# EAGLE board TSAL_rev02 (EAGLE 6.6.0)
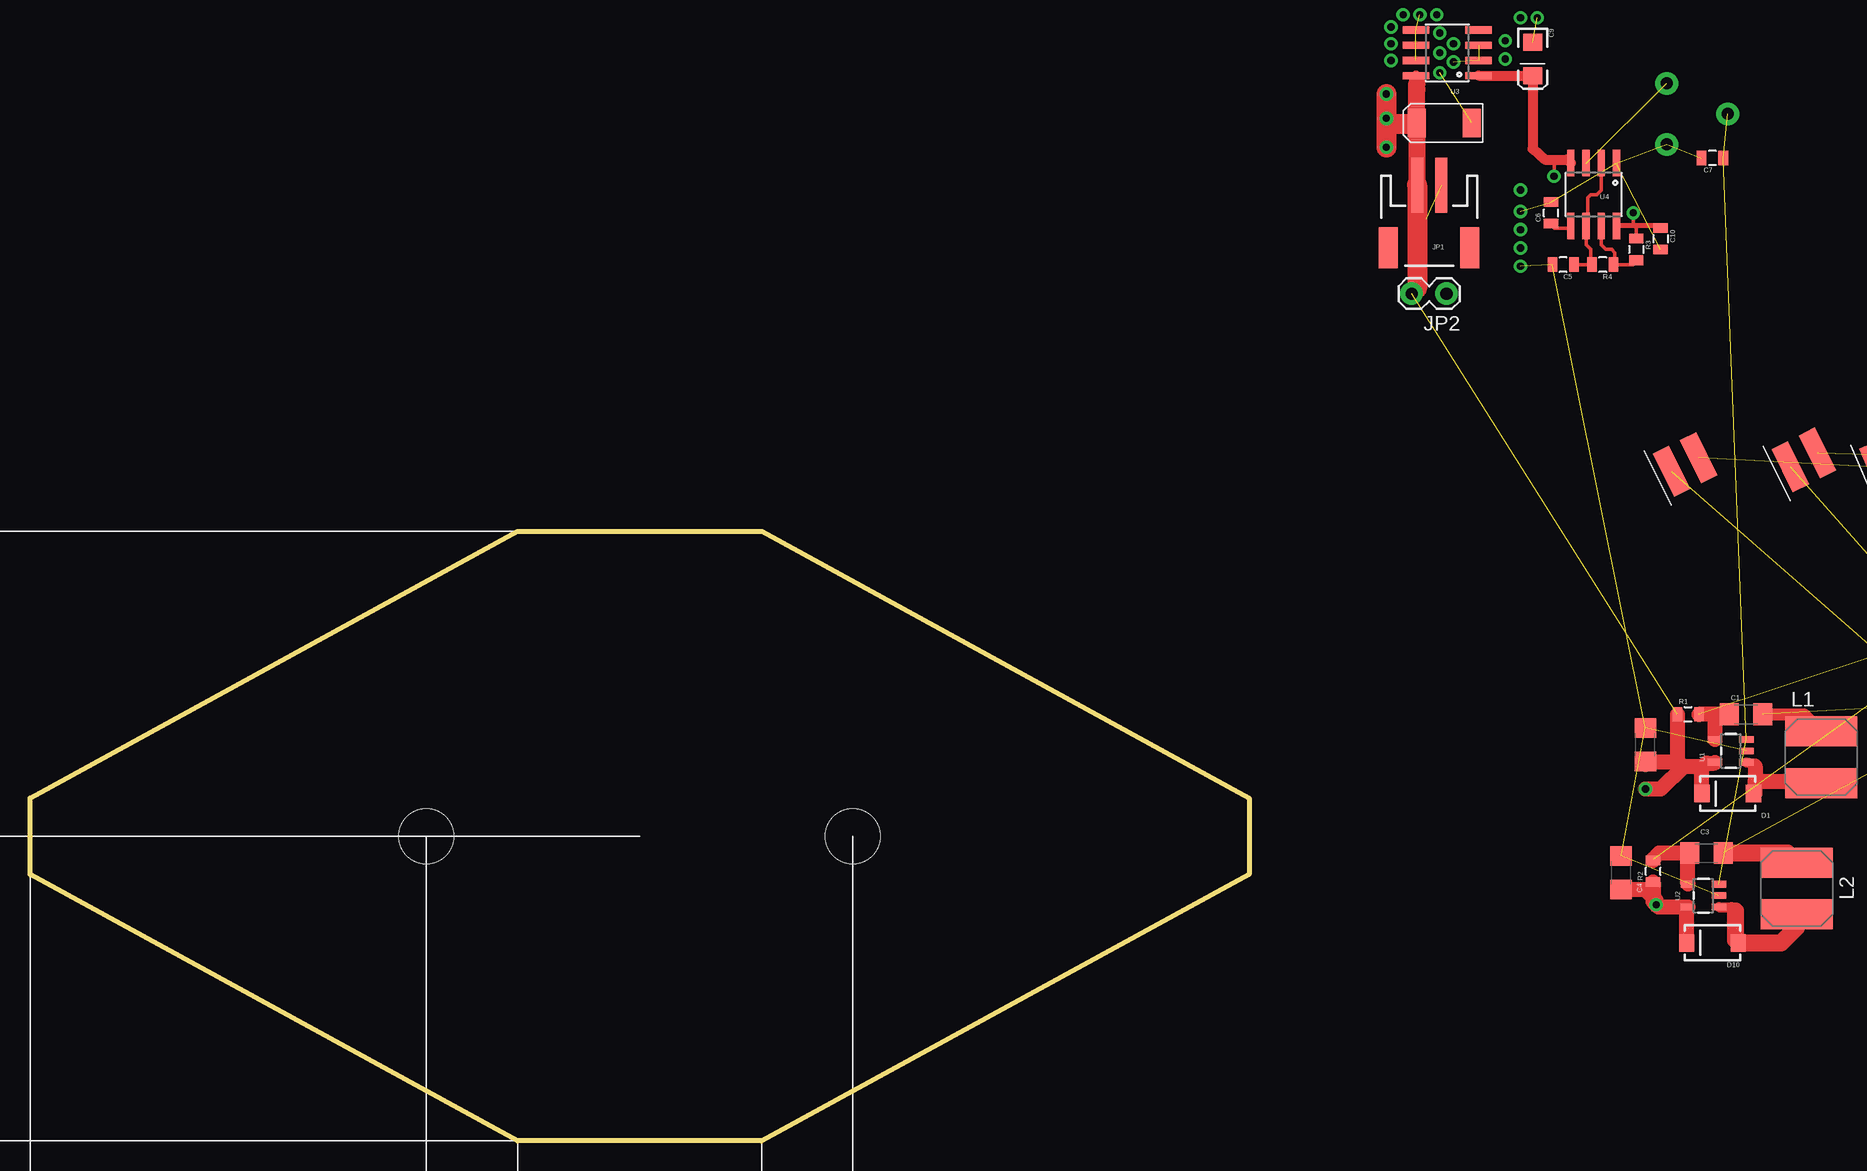
[diagram p0: board, top side]
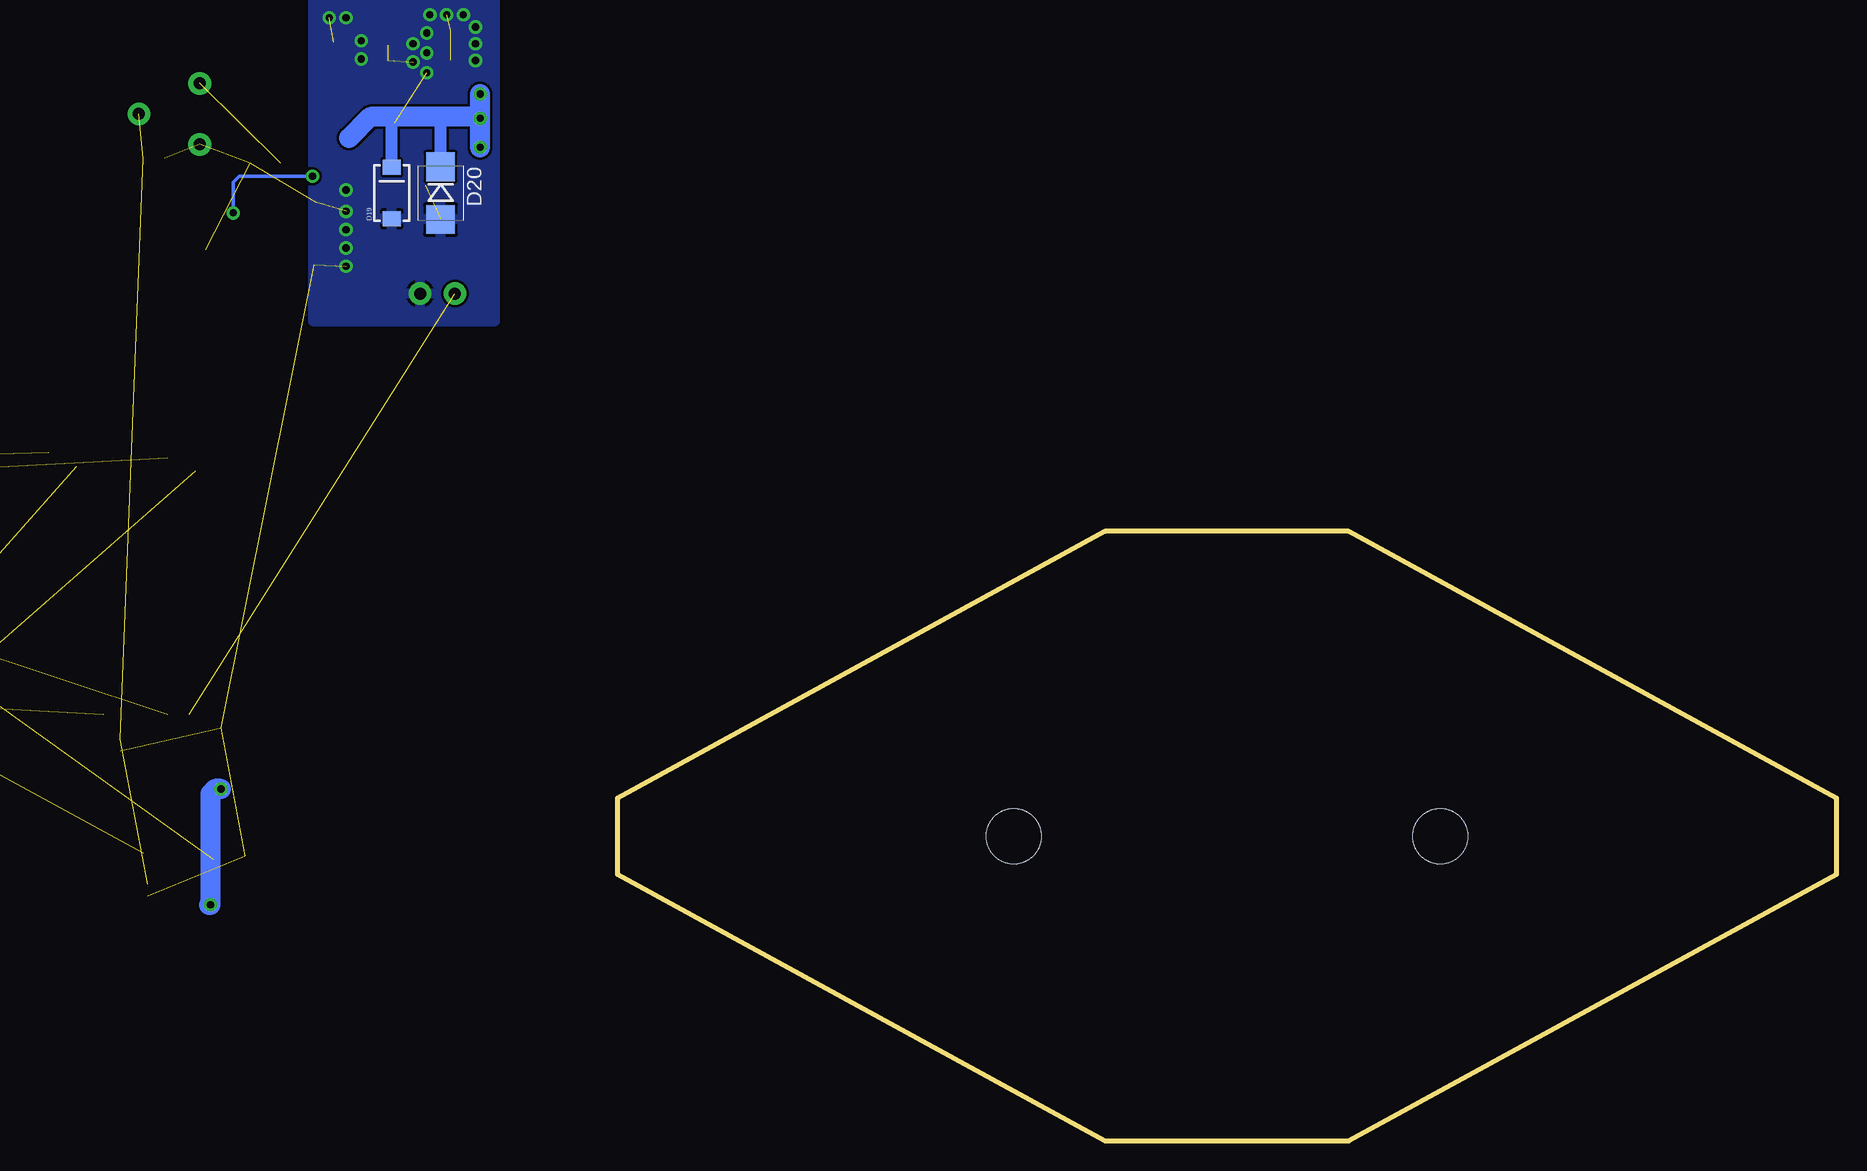
[diagram p1: board, bottom side, seen from below]

Size 101.6 x 50.8 mm. Coordinates in mm from the lower left corner, seen from the top.
Outline: 0,22.22 0,28.57 40.64,50.8 60.96,50.8 101.6,28.57 101.6,22.22 60.96,0 40.64,0 0,22.22
Copper layers (1*16): Top 0.035mm / dielectric 1.5mm / Bottom 0.035mm
Design rules "Sparkfun": minimum track width 8mil, minimum drill 20mil, track to track 8mil, track to pad 8mil, pad to pad 8mil, via to via 8mil, smd to smd 8mil, copper to edge 8mil, drill to drill 8mil, minimum pad ring 12mil, minimum via ring 10mil, stop-mask expansion 4mil, vias tented up to drill 20mil, thermal gap 10mil
Net classes: 0 default: width 0.254 mm; 1 power: width 0.508 mm
Holes 4.57 mm at 33.02,25.4 68.58,25.4

## Footprints (pad centres in the part's own frame; a part is rotated, then mirrored left to right if it is on the bottom)
1206 = smd 1.6 x 1.8: 1 -1.4,0; 2 1.4,0
0805 = smd 0.8 x 1.2: 1 -0.9,0; 2 0.9,0
EIA6032 = smd 1.5 x 2.4: P$1 -2.3,0; P$2 2.3,0
EIA3216 = smd 1.4 x 1.6: A 1.4,0; C -1.4,0
SMA-DIODE = smd 1.27 x 1.47: A -2.15,0; C 2.15,0
LED-SM = smd 1.5 x 4: A 1.27,0; C -1.27,0
SMB-DIODE = smd 2.4 x 2.4: A 2.2,0; C -2.2,0
JST-2-SMD = smd 1 x 4.6: 1 -1,-3.7; 2 1,-3.7 | smd 1.6 x 3.4: NC1 -3.4,1.5; NC2 3.4,1.5
1X02_LOCK = drill 1.016 pad 1.88: 1 -0.178,0; 2 2.718,0
SRN6045 = smd 2.5 x 6: 1 -2.175,-0.175; 2 2.125,-0.175
TRIM_POT = drill 1 pad 1.88: 1 5.08,0; 2 0,2.54; 3 0,-2.54
SOT23-5 = smd 0.55 x 1.2: 1 -0.95,-1.3; 2 0,-1.3; 3 0.95,-1.3; 4 0.95,1.3; 5 -0.95,1.3
SO08 = smd 0.61 x 2.21: 1 -1.905,-2.616; 2 -0.635,-2.616; 3 0.635,-2.616; 4 1.905,-2.616; 5 1.905,2.616; 6 0.635,2.616; 7 -0.635,2.616; 8 -1.905,2.616

## Placement (x,y rotation side)
C1  1uF  [1206]  143,35.56 0 top  (outside the outline)
C2  2.2uF  [1206]  134.62,33.02 90 top  (outside the outline)
C3  1uF  [1206]  139.7,24 0 top  (outside the outline)
C4  2.2uF  [1206]  132.59,22.35 90 top  (outside the outline)
C5  47uF  [0805]  127.76,73.03 180 top  (outside the outline)
C6  10uF  [0805]  126.75,77.34 90 top  (outside the outline)
C7  10uF  [0805]  140.21,81.91 180 top  (outside the outline)
C8  [EIA6032]  117.86,84.84 0 top  (outside the outline)
C9  [EIA3216]  125.22,90.17 270 top  (outside the outline)
C10  .1uF  [0805]  135.89,75.18 270 top  (outside the outline)
D1  MBRA140  [SMA-DIODE]  141.48,28.96 180 top  (outside the outline)
D2  [LED-SM]  183.13,51.05 338.2 top  (outside the outline)
D3  [LED-SM]  171.83,55.5 335.6 top  (outside the outline)
D4  [LED-SM]  161.93,57.02 359.3 top  (outside the outline)
D5  [LED-SM]  147.83,56.77 26.5 top  (outside the outline)
D6  [LED-SM]  192.4,6.35 242.8 top  (outside the outline)
D7  [LED-SM]  186.82,15.24 248.2 top  (outside the outline)
D8  [LED-SM]  184.02,27.05 271 top  (outside the outline)
D9  [LED-SM]  177.67,36.2 293.2 top  (outside the outline)
D10  MBRA140  [SMA-DIODE]  140.21,16.51 180 top  (outside the outline)
D11  [LED-SM]  176.15,54.1 337.5 top  (outside the outline)
D12  [LED-SM]  167,56.52 0 top  (outside the outline)
D13  [LED-SM]  155.07,56.64 23.2 top  (outside the outline)
D14  [LED-SM]  137.92,56.39 26.5 top  (outside the outline)
D15  [LED-SM]  190.12,10.67 245.2 top  (outside the outline)
D16  [LED-SM]  186.69,20.57 270.1 top  (outside the outline)
D17  [LED-SM]  180.47,31.75 297 top  (outside the outline)
D18  [LED-SM]  177.55,42.42 296.5 top  (outside the outline)
D19  TVS  [SMA-DIODE]  120.4,78.99 90 bottom  (outside the outline)
D20  30v  [SMB-DIODE]  116.33,78.99 270 bottom  (outside the outline)
JP1  M02-JST-2MM-SMT  [JST-2-SMD]  116.59,75.95 180 top  (outside the outline)
JP2  M02LOCK  [1X02_LOCK]  117.86,70.61 180 top  (outside the outline)
L1  33uH  [SRN6045]  149.1,32 90 top  (outside the outline)
L2  33uH  [SRN6045]  147.07,21.08 90 top  (outside the outline)
R1  5R  [0805]  138.18,35.56 0 top  (outside the outline)
R2  5R  [0805]  135.25,22.48 90 top  (outside the outline)
R3  10k  [0805]  133.86,74.3 270 top  (outside the outline)
R4  1k  [0805]  131.06,73.03 180 top  (outside the outline)
RV1  [TRIM_POT]  136.4,85.6 0 top  (outside the outline)
U1  [SOT23-5]  141.73,32.51 90 top  (outside the outline)
U2  [SOT23-5]  139.45,20.45 90 top  (outside the outline)
U3  LM2931D-5.0R2G  [SO08]  118.11,90.68 90 top  (outside the outline)
U4  [SO08]  130.3,78.87 180 top  (outside the outline)
U$1  LOGOL  [L-L]  150.75,63.37 0 top  (outside the outline)

## Library data of the parts
C1 C3 = SparkFun-Capacitors; PROD_ID: CAP-09822
C2 C4 = SparkFun-Capacitors; PROD_ID: CAP-10009
C5-C10 = SparkFun-Capacitors
D1 D10 = SparkFun-DiscreteSemi; PROD_ID: DIO-08053
D2-D9 D11-D18 = FSAE Eletric
D19 D20 = SparkFun-DiscreteSemi
JP1 = SparkFun-Connectors; PROD_ID: CONN-08352
JP2 = SparkFun-Connectors
L1 L2 = SparkFun-Passives; PROD_ID: NDUC-11627
R1-R4 = SparkFun-Resistors; PROD_ID: RES-11622
RV1 = SparkFun-Electromechanical
U1 U2 = SparkFun-PowerIC; PROD_ID: IC-11626
U3 = SparkFun-PowerIC
U4 = SparkFun-AnalogIC
U$1 = untitled

## Nets
+5V: C9.A C10.1 R3.1 U3.1 U4.4 U4.8
GND: C2.2 C4.2 C5.2 C6.2 C7.2 C8.P$2 C9.C C10.2 D19.A D20.A JP1.1 JP2.1 RV1.3 U1.2 U2.2 U3.2 U3.3 U3.5 U3.6 U3.7 U4.1
N$1: D2.C D3.A
N$2: D4.C D5.A
N$3: D6.C D7.A
N$4: D8.C D9.A
N$5: D3.C D4.A
N$6: D5.C D6.A
N$7: D7.C D8.A
N$8: D11.C D12.A
N$9: D13.C D14.A
N$10: D15.C D16.A
N$11: D17.C D18.A
N$12: D12.C D13.A
N$13: D14.C D15.A
N$14: D16.C D17.A
N$15: R3.2 R4.1 U4.7
N$16: C5.1 R4.2 U4.2 U4.6
N$17: C6.1 U4.5
N$18: RV1.2 U4.3
N$20: C7.1 RV1.1 U1.3 U2.3
OUT+: C1.1 D2.A R1.2 U1.4
OUT+1: C3.1 D11.A R2.2 U2.4
OUT- [power]: C1.2 D9.C L1.2
OUT-1 [power]: C3.2 D18.C L2.2
SW: D1.A L1.1 U1.1
SW1: D10.A L2.1 U2.1
VIN: C2.1 C4.1 C8.P$1 D1.C D10.C D19.C D20.C JP1.2 JP2.2 R1.1 R2.1 U1.5 U2.5 U3.8

## Tracks (layer width: path | path; a pad name or v marks a point on that pad's centre or on a via)
+5V  (via drill 0.6)
  Top 0.305: R3.1 133.86,76.07 133.6,76.33 | 133.6,76.33 132.28,76.33 U4.8 | U4.4 126.95,81.74 127,81.69 v127,80.39 | v133.6,77.34 133.6,76.33
  Top 0.406: C10.1 135.64,76.25 U4.8
  Top 0.813: U3.1 124.71,88.77 C9.A 125.22,82.68 126.24,81.79 128.09,81.79 U4.4
  Bottom 0.305: v127,80.39 133.1,80.39 133.6,79.88 v133.6,77.34
GND  (via drill 0.6)  (18 unrouted)
  other vias: 122.94,90.17 122.94,91.69 118.62,89.92 118.62,91.44 113.41,90.04 113.41,91.44 113.41,92.84 114.43,93.85 115.82,93.85 117.22,93.85 117.47,90.68 117.47,89.03 117.47,92.33 124.21,93.6 125.6,93.6 124.21,75.95 124.21,77.47 124.21,79.25 124.21,74.42 124.21,72.9
  pour Bottom: 111.76,68.33 111.76,96.27 127,96.27 127,68.33
N$1  (1 unrouted)
N$2  (1 unrouted)
N$3  (1 unrouted)
N$4  (1 unrouted)
N$5  (1 unrouted)
N$6  (1 unrouted)
N$7  (1 unrouted)
N$8  (1 unrouted)
N$9  (1 unrouted)
N$10  (1 unrouted)
N$11  (1 unrouted)
N$12  (1 unrouted)
N$13  (1 unrouted)
N$14  (1 unrouted)
N$15
  Top 0.305: U4.7 130.94,74.68 131.32,74.3 131.83,74.3 132.08,74.04 132.08,73.14 R4.1 133.6,73.03 133.86,73.28 R3.2
N$16
  Top 0.305: C5.1 R4.2 130.05,73.14 130.05,74.3 129.67,74.68 U4.6 129.79,76.38 129.79,78.61 130.05,78.87 130.56,78.87 130.94,79.25 U4.2
N$17
  Top 0.305: C6.1 126.75,76.33 127,76.07 128.22,76.07 U4.5
N$18  (1 unrouted)
N$20  (3 unrouted)
OUT+  (1 unrouted)
  Top 1.27: C1.1 140.46,35.56 | 140.46,35.56 R1.2 | U1.4 140.43,35.53 140.46,35.56
OUT+1  (1 unrouted)
  Top 1.27: R2.2 135.25,23.49 135.76,24 C3.1 138.15,23.85 U2.4
OUT-  (1 unrouted)
  Top 1.016: C1.2 147.84,35.56 L1.2
OUT-1  (1 unrouted)
  Top 1.422: C3.2 146.44,24 L2.2
SW
  Top 0.813: U1.1 143.54,31.47 143.76,31.24
  Top 1.27: 143.76,29.58 143.76,28.96 D1.A 143.76,29.58 | 143.76,29.58 143.76,29.97 | 143.76,29.97 149.13,29.97 L1.1 | 143.76,31.24 143.76,29.97
SW1
  Top 0.813: U2.1 141.79,19.5 142.11,19.18
  Top 1.422: L2.1 147.19,18.86 147.19,17.78 145.92,16.51 D10.A 142.11,16.75 142.11,19.18
VIN  (via drill 0.6)  (1 unrouted)
  Top 0.305: U3.8 115.49,84.76 115.44,84.71
  Top 0.813: 115.57,88.14 115.57,88.7 U3.8
  Top 1.27: D1.C 139.33,31.12 139.45,31.24 | U1.5 140.37,31.5 139.7,31.5 139.45,31.24 | R1.1 137.28,31.63 | 137.28,31.63 137.67,31.24 137.8,31.24 | 137.8,31.24 139.45,31.24 | v135.51,19.68 135.51,20.07 134.62,20.95 C4.1 | D10.C 138.06,19.41 U2.5 135.7,19.5 v135.51,19.68 | R2.1 135.25,19.94 v135.51,19.68 | 137.28,31.63 137.26,31.62 C2.1 134.62,31.37 | v134.62,29.34 135.89,29.34 137.8,31.24
  Top 1.422: JP1.2 115.59,85.31 C8.P$1 115.56,87.62 115.57,87.63 115.57,88.14
  Top 1.676: 115.44,84.71 113.54,84.71 v113.03,85.22 | v113.03,87.25 v113.03,82.8 | JP1.2 115.59,71.06 JP2.2
  Bottom 1.016: D20.C 116.33,85.34 116.59,85.34 | D19.C 120.4,85.34
  Bottom 1.676: 113.03,85.34 v113.03,85.22 v113.03,82.8 | 113.03,85.34 v113.03,87.25 | 113.03,85.34 116.59,85.34 120.4,85.34 122.17,85.34 123.95,83.57 | v134.62,29.34 135.13,29.34 135.51,28.96 v135.51,19.68 135.64,19.68